# Altium PCB RS485.PcbDoc
Units mil, origin at the board's own origin, x right, y up, seen from the top; angles counter-clockwise.
Board outline 2567.03 x 892.03 mil, 2 copper layers (Top Layer, Bottom Layer); 37 components, 24 nets, 115 pads, 41 vias.
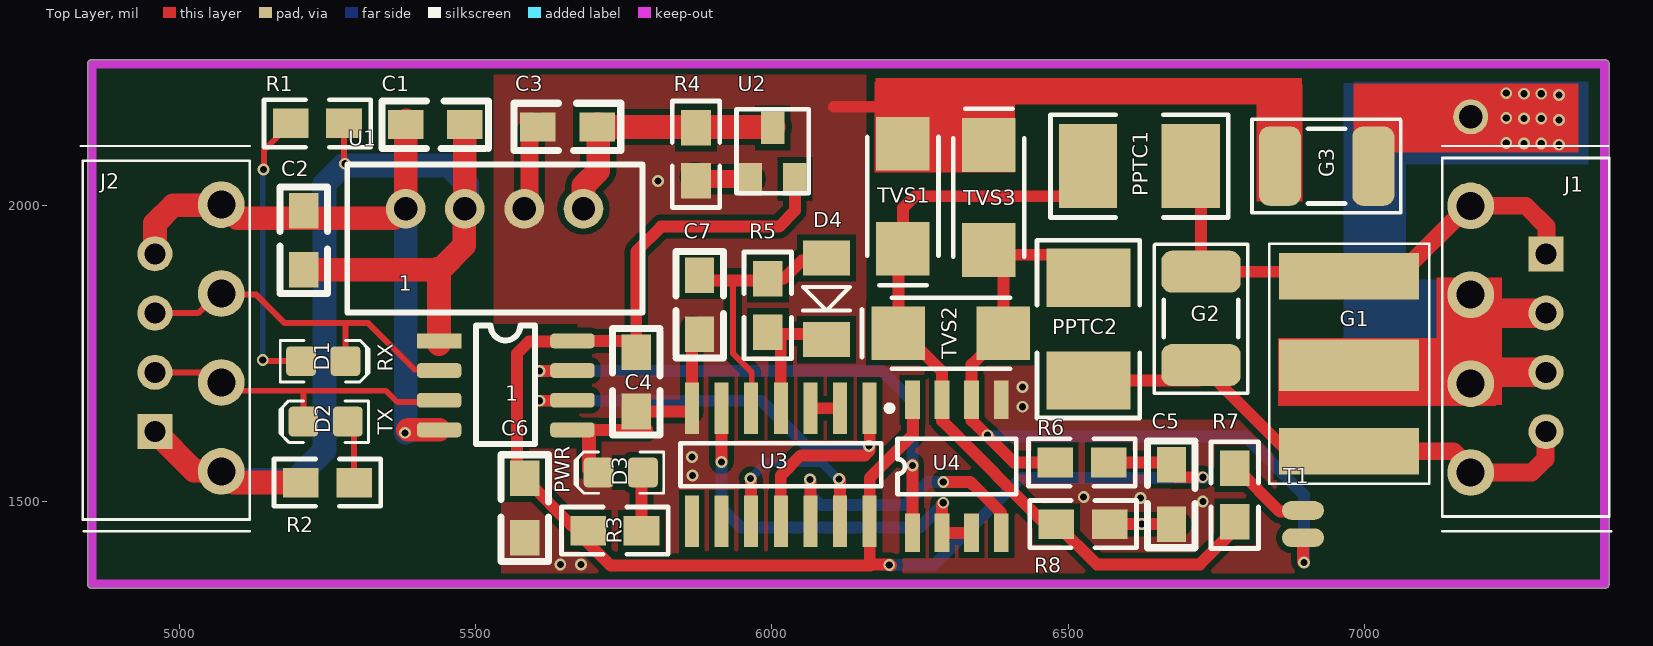
[diagram p0: Top Layer view]
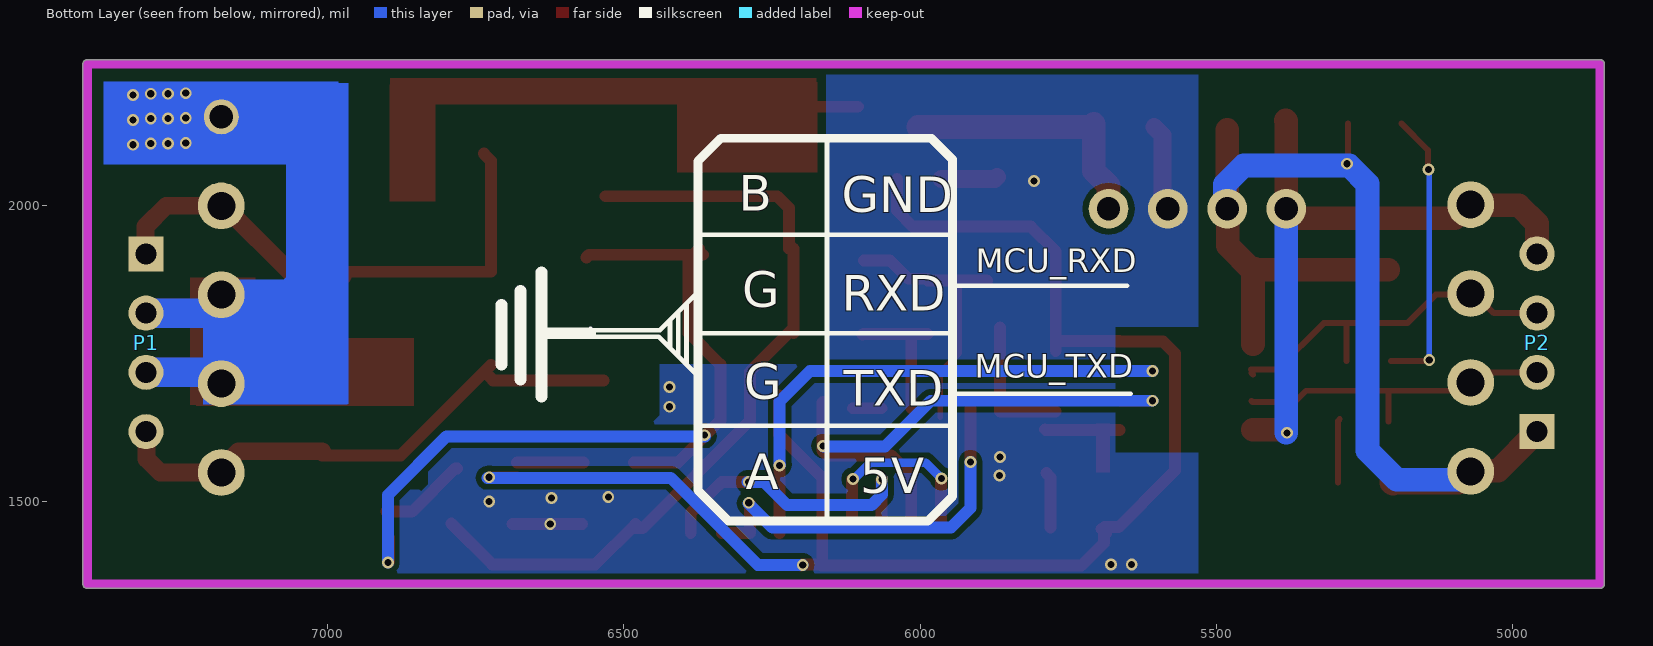
[diagram p1: Bottom Layer view, seen from below]

## Layer stack, top to bottom
Top Solder: solder mask 0.4, Solder Resist, Dk 3.5
Top Layer: signal copper 1.4
Dielectric1: dielectric 12.6, FR-4, Dk 4.8
Bottom Layer: signal copper 1.4
Bottom Solder: solder mask 0.4, Solder Resist, Dk 3.5

## Board outline
4845.48,1361 ccw(c4853,1361) 4853,1353.48 7405,1353.48 ccw(c7405,1361) 7412.52,1361 7412.52,2238 ccw(c7405,2238) 7405,2245.51 4853,2245.51 ccw(c4853,2238) 4845.48,2238

## Design rules (kind name [scope] priority, off if disabled: settings)
Clearance [All] p1: gap=10
PlaneConnect [All] p1: planeconnectstyle=Direct reliefexpansion=20 reliefentries=4 reliefconductorwidth=10 reliefairgap=10
PolygonConnect [All] p1: connectstyle=Direct reliefconductorwidth=10 reliefentries=4 polygonreliefangle="90 Angle" airgapwidth=10
RoutingVias [All] p1: holewidth=28 width=50 viastyle="Through Hole" minholewidth=28 minwidth=50 maxholewidth=28 maxwidth=50
SolderMaskExpansion [All] p1: expansion=4
Width [All] p1: maxlimit=100 minlimit=10 preferedwidth=10
29 further rules are at their usual default settings.

## Components (designator, comment, footprint, x,y, rotation, side; value= is the part's Value field where it differs from the comment)
1 "ADU3201" SO-8 5551,1696 r0 top
C1 "104" C_0805 5432,2136 r0 top
C2 "4.7uF" C_0805 5210,1941 r270 top
C3 "105" C_0805 5655,2132 r0 top
C4 "104" C_0805 5771,1702 r90 top
C5 "104" C_0805 6674,1512 r90 top
C6 "104" C_0805 5583,1489 r90 top
C7 "104" C_0805 5878,1832 r270 top
D1 "LED" 0805-LED-RED 5243,1737 r0 top
D2 "LED" 0805-LED-RED 5247,1635 r180 top
D3 "LED" 0805-LED-RED 5745,1549 r180 top
D4 "1N4148" DIODE-1206 6092,1911 r270 top
G1 "GDT_3" GDT3B 6979,1725 r0 top
G2 "GDT" 1812_C 6724,1809 r90 top
G3 "GDT" 1812_C 6936,2066 r0 top
J1 "CON4" Conect4_3.81E 7181,1775 r90 top
J2 "CON4" Conect4_3.81E 5069,1775 r270 top
P1 "Header 4" HDR1X4 7306,1918 r270 bottom
P2 "Header 4" HDR1X4 4959,1618 r90 bottom
PPTC1 "0.1A 60V" 1812F 6620,2066 r0 top
PPTC2 "0.1A 60V" 1812F 6534,1791 r270 top
R1 "5K" 0805 5188,2138 r0 top
R2 "5K" 0805 5295,1532 r180 top
R3 "3.3K" 0805 5780,1451 r180 top
R4 "470" 0805 5872,2041 r90 top
R5 "10K" 0805 5993,1786 r90 top
R6 "4.7K" 0805 6568,1566 r180 top
R7 "120" 0805 6781,1556 r270 top
R8 "4.7K" 0805 6480,1462 r0 top
T1 "TIN" TIN 6975,1471 r270 top
TVS1 "TVS_2" DIODE-SMA 6221,2015 r270 top
TVS2 "TVS_2" DIODE-SMA 6302,1784 r180 top
TVS3 "TVS_2" DIODE-SMA 6366,2013 r90 top
U1 "B0505S-1W" B0505S-1W 5582,1869 r270 top
U2 "ME6209_SOT233" "SOT-23 - duplicate1" 5964,2044 r0 top
U3 "74LS04" SOP-14N 6015,1562 r270 top
U4 "SP3485" SOP-8 6237,1447 r90 top

## Footprints (in the part's own frame and the unit in brackets; to place one, negate y for a bottom-side part, rotate by r counter-clockwise, add the part's x,y. Pads: shape width x height; smd on the part's side, far side on the other; paste and mask are expansions set on the pad)
0805 [mil]
  rect 60x50 smd: 1(0,0) 2(90,0)
  silkscreen extent -45,-40 135,40
0805-LED-RED [mil]
  round 20 on Mech14: 0(0,0)
  rrect25% 50x50 smd: A(-37.5,0) K(37.5,0)
  Top Layer pour cut-out: -15,30 15,30 15,-30 -15,-30
  silkscreen extent -73,-35 77,35, body extent -39,-25 39,25, height 31
1812_C [mm]
  rrect50% 1.8x3.4 smd: 1(-2,0) 2(2,0)
  silkscreen extent -3.2,-2.01 3.17,2, body extent -2.4,-1.6 2.4,1.6, height 1.6
1812F [mm] "保险丝"
  rect 2.5x3.6 smd: 1(-2.2,0) 2(2.2,0)
  silkscreen extent -3.81,-2.2 3.81,2.2, body extent -2.54,-1.65 2.67,1.65, height 1.2
B0505S-1W [mm]
  round 1.7 hole 1: 1(-3.175,-5.08) 2(-3.175,-2.54) 3(-3.175,0) 4(-3.175,2.54)
  silkscreen extent -5.08,-7.58 1.27,5.08
C_0805 [mil]
  rect 60x49.21 smd: 1(-50,0) 2(50,0)
  silkscreen extent -90,-40 90,40, body extent -45,-25 34,25, height 36
Conect4_3.81E [mm]
  round 2 hole 1.2: 1(5.69,0.051) 2(1.88,0.051) 3(-1.93,0.051) 4(-5.74,0.051)
  silkscreen extent -8.25,-5.97 8.25,1.27
DIODE-1206 [mm] "玻璃封装二极管"
  rect 1.5x2 smd: 1(0,0) 2(3.5,0)
  silkscreen extent 1.25,-1 2.25,1
DIODE-SMA [mm] "贴片二极管"
  rect 2.3x2.3 smd: 1(-2.25,0) 2(2.25,0)
  silkscreen extent -2.54,-1.52 3.81,1.52, body extent -2.92,-1.4 2.92,1.4, height 3
GDT3B [mil]
  rect 236.22x78.74 smd: 1(-5,155) 3(-5,-140)
  rect 236.22x86.61 smd: 2(-5,5)
  silkscreen extent -140,-195 130,210
HDR1X4 [mm] "Connector; Header; 4 Position"
  rect 1.5x1.5 hole 0.9: 1(0,0)
  round 1.5 hole 0.9: 2(2.54,0) 3(5.08,0) 4(7.62,0)
SO-8 [mil]
  round 20 on Top Overlay: 0(-28.5,62.8)
  rect 75x25 smd: 1(-112.5,75)
  rrect50% 75x25 smd: 2(-112.5,25) 3(-112.5,-25) 4(-112.5,-75) 5(112.5,-75) 6(112.5,-25) 7(112.5,25) 8(112.5,75)
  silkscreen extent -50,-99 50,101, body extent -118,-96 118,96
SOP-8 [mil]
  rect 65x25 smd: 1(0,0) 2(0,-50) 3(0,-100) 4(0,-150) 5(224.41,-150) 6(224.41,-100) 7(224.41,-50) 8(224.41,0)
  silkscreen extent 65,-175 159,25
SOP-14N [mm] "SOP, 14-Leads,"
  rect 2.2x0.6 smd: 1(-2.425,3.81) 2(-2.425,2.54) 3(-2.425,1.27) 4(-2.425,0) 5(-2.425,-1.27) 6(-2.425,-2.54) 7(-2.425,-3.81) 8(2.425,-3.81) 9(2.425,-2.54) 10(2.425,-1.27) 11(2.425,0) 12(2.425,1.27) 13(2.425,2.54) 14(2.425,3.81)
  silkscreen extent -2.55,-4.3 0.93,4.79, body extent -3.03,-4.35 3.03,4.35, height 1.95
"SOT-23 - duplicate1" [mm]
  rect 1x1.4 smd: 1(0,0) 2(1.9,0) 3(0.95,2.2)
  silkscreen extent -0.6,-0.6 2.5,3, body extent -0.51,-0.18 2.39,2.62
TIN [mil]
  oval 31.5x70.87 smd: 1(-14,-79) 2(32,-79)

## Part data
C1 C2 C3 C4 C5 C6 C7: library part C
D4: library part D
G1 G2 G3: "放电器"
P1 P2: "Header, 4-Pin"
PPTC1 PPTC2: library part PPTC
R1 R2 R3 R4 R5 R6 R7 R8: library part R
TVS1 TVS2 TVS3: "TVS双向二极管"
U1: "DC/DC隔离电源（Mornsun）"
U2: library part ME6209
U3: "非门"
U4: library part MAX3485

## Free pads (board coordinates)
  round 59.06 hole 39.37: 2(7179,2149)

## Via types
v1: diameter 20, hole 12, Top Layer to Bottom Layer, 41 vias

## Nets (pads, with @x,y where several pads share a name; then routed paths per layer and width w, separated by ;. In a path a pad name is that pad's centre, name@x,y a point inside that pad or via, vN(x,y) a via of type N, cw(c..) or ccw(c..) an arc to the next point about the centre after c; other vN are vias at no path point)
485_A: PPTC2.1 R6.2 T1.2 TVS2.1 TVS3.1 U4.6 | length 1422.5
  Top Layer w20: TVS3.1@6366,1916.42 TVS3.1@6382.58,1916.42 ; TVS3.1@6373,1926 TVS3.1@6382.58,1916.42 ; TVS2.1@6389,1783 6337,1731 U4.6 6337,1637 6408,1566 R6.2 R6.2@6483,1566 ; TVS2.1 6390.58,1908.42 TVS3.1@6382.58,1916.42 ; PPTC2.1@6563,1912 6558.58,1916.42 TVS3.1@6382.58,1916.42 ; T1.2 6896,1399 v1@6897,1398
  Bottom Layer w20: v1@6363,1610 6799,1610 6898,1511 v1(6898,1397)
  other v1: 6364,1612
485_B: PPTC1.1 R7.2 R8.1 TVS1.2 TVS2.2 U4.7 | length 1355.1
  Top Layer w20: TVS2.2 6213.42,1926.42 TVS1.2@6217,1930 ; TVS2.2@6217,1789 6287,1719 U4.7 6287,1636 6468,1455 R8.1@6483,1455 ; TVS1.2 6221,1995 6241,2015 PPTC1.1@6531,2015 ; R8.1 6548,1394 6722,1394 R7.2@6791,1463
485_EN: U3.6 U4.2 U4.3 | length 669.1
  Top Layer w20: v1@5915,1568 U3.6 ; v1@6287,1496 U4.2 U4.3@6334,1447
  Bottom Layer w20: v1(5915,1567) 5915,1489 5948,1456 6249,1456 v1@6290,1497
  other v1: 6289,1498
485_RX: 1.7 U4.1 | length 923.5
  Top Layer w20: v1(5608,1720) 1.7@5658,1720 ; U4.1 v1(6237,1561) v1@6237,1563
  Bottom Layer w20: v1(5608,1720) 6186,1720 6237,1669 6237,1563 v1@6236,1562
485_TX: U3.12 U4.4 | length 498
  Top Layer w20: v1(6064,1537) 6065,1536 U3.12 ; v1@6291,1533 6334.57,1533 6338.57,1529 6339,1529 6387,1481 U4.4
  Bottom Layer w20: v1(6064,1537) 6064,1512 6082,1494 6224,1494 6263,1533 v1@6291,1533
  other v1: 6289,1533
A: G1.3 G2.1 J1.4 P1.4 PPTC2.2 | length 931.3
  Top Layer w20: PPTC2.2 6720.39,1704.39 G2.1@6735.13,1719.13 ; G2.1 G2.1@6735.13,1719.13 ; G1.3@7009,1578 6876.26,1578 G2.1@6735.13,1719.13
  Top Layer w30: G1.3@7009,1585 7150,1585 J1.4@7185,1550 ; J1.4 7282,1549 7305,1572 P1.4@7305,1622
ADU_RX: 1.2 D1.K J2.3 P2.3 | length 615
  Top Layer w10: P2.3 5032,1818 J2.3@5066,1852 ; J2.3@5068,1849 5130,1849 5178,1801 5319,1801 5397,1723 1.2@5442,1723 ; D1.K 5280.5,1800.5 ; 1.2@5438,1714 1.2@5441,1717
ADU_TX: 1.3 D2.K J2.2 P2.2 | length 559.8
  Top Layer w10: P2.2 5048,1718 J2.2@5069,1697 ; J2.2@5066,1706 J2.2 5085,1687 5349,1687 5368,1668 5439,1668 1.3@5441,1670 ; D2.K 5209.5,1684.5
ADU_TXO: 1.6 U3.1 U3.11 | length 968.2
  Top Layer w20: v1(5608,1670) 1.6@5662,1670 ; U3.11 6015,1544 6049,1578 6157,1578 6165,1586 6165,1667 U3.1@6164,1668
  Bottom Layer w20: v1(5608,1670) 5982,1670 6059,1593 v1@6163,1593
  other v1: 6164,1594
B: G1.1 G2.2 J1.1 P1.1 PPTC1.2 | length 913.6
  Top Layer w20: PPTC1.2@6736,2087 6724,2075 G2.2 6983.26,1887.74 G1.1@6988,1883
  Top Layer w30: G1.1 7056,1880 J1.1@7179,2003 ; J1.1 7272,1999 7307,1964 P1.1@7307,1919
GGND: G1.2 G3.2 J1.2 J1.3 P1.2 P1.3 pad.2 | length 1754.2
  Top Layer w50: G1.2@6888,1699 J1.3 J1.3@7179,1718 ; J1.3@7167,1718 J1.3@7179,1718 ; J1.2@7174,1818 J1.2@7179,1818 ; J1.2 J1.2@7179,1857 ; P1.3 J1.3@7179,1718 ; P1.2 J1.2@7179,1818 ; J1.3@7179,1718 J1.2@7179,1818
  Bottom Layer w50: J1.3@7154,1715 7157,1718 J1.3@7181,1718 ; J1.2@7162,1824 7168,1818 J1.2@7181,1818 ; pad.2 7000,2151 7000,1913 7064,1849 J1.2 7181,1849 J1.2@7181,1824 ; J1.3@7181,1702 J1.3@7181,1718 ; P1.3 J1.3@7181,1718 ; P1.2 J1.2@7181,1818 ; J1.3@7181,1718 J1.2@7181,1818
  other v1: 7328,2102 7269,2104 7298,2104 7239,2105 7328,2144 7269,2146 7298,2146 7239,2147 7328,2186 7269,2188 7298,2188 7239,2189
GND: 1.4 C1.1 C2.1 J2.4 P2.4 U1.1 | length 1083.2
  Top Layer w40: P2.4 4959,1969 4990,2000 J2.4@5072,2000 ; J2.4@5073,2003 5098,1978 5362,1978 U1.1@5382,1998 ; U1.1@5383,1999 U1.1@5382,1998 ; C1.1@5383,2143 5382,2142 U1.1@5382,1998 ; v1@5386,1621 1.4 ; U1.1@5387,1987 U1.1@5388,1988
  Bottom Layer w40: v1@5382,1616 U1.1
  other v1: 5381,1616
GND_485: 1.5 C3.1 C4.1 C5.1 C6.1 C7.2 D3.K G3.1 R4.1 R8.2 TVS1.1 TVS3.2 U1.3 U2.1 U3.7 U4.5 | length 883.5
  Top Layer w20: C3.1@5603,2132 C3.1@5603,2134 ; 1.5 5788,1621 5789,1622 ; C4.1 U3.7@5865,1652 ; U3.7 C7.2@5865,1794 ; 6105,2166 6268,2166 6270,2164 ; TVS3.2@6373.58,2103.58 TVS3.2@6374,2104 ; R8.2 C5.1@6688,1462
  Top Layer w30: U1.3@5581,1997 5591,2007 5591,2118 C3.1 ; R4.1@5870,2048 5874,2044 U2.1
  other v1: 5643,1394 5678,1394 6624,1462 6727,1500 6622,1506 6526,1508 5866,1544 5865,1575 6423,1660 6423,1693 5808,2041
NetC3_2: C3.2 R4.2 U1.4 U2.3 | length 449.4
  Top Layer w40: U1.4 5682,2033 5707,2058 C3.2@5707,2132 ; C3.2@5707,2137 C3.2@5707,2132 ; U2.3@6003,2132 C3.2@5707,2132
NetC7_1: C7.1 D4.1 R5.2 U3.5 | length 464.1
  Top Layer w10: 5934,1873 5934,1750 5966,1718 U3.5@5966,1643
  Top Layer w20: C7.1@5887,1873 5934,1873 R5.2@5987,1873 ; R5.2@5987,1876 6020,1876 6051,1907 D4.1@6095,1907
NetD1_A: D1.A R1.1 | length 477.6
  Top Layer w10: v1@5143,1736 5144,1737 D1.A ; v1@5143,2060 5143,2093 R1.1
  Bottom Layer w10: v1(5141,1739) v1@5141,2057
  other v1: 5142,2060
NetD2_A: D2.A R2.1 | length 108.2
  Top Layer w10: D2.A@5292,1639 5295,1636 R2.1
NetD3_A: D3.A R3.1 | length 94.9
  Top Layer w20: R3.1@5780,1456 5780,1541 D3.A@5787,1548
NetD4_2: D4.2 R5.1 U3.4 | length 232.9
  Top Layer w20: R5.1@5987,1783 6096,1783 D4.2@6097,1782 ; U3.4 R5.1@6015,1780
NetR7_1: R7.1 T1.1 | length 157.2
  Top Layer w10: T1.1 T1.1@6904,1485
  Top Layer w20: R7.1 6784,1556 6857,1483 T1.1@6900,1483
NetU3_2: U3.2 U3.3 | length 48.5
  Top Layer w20: U3.3 U3.2@6113.53,1657.47
NetU3_10: U3.10 U3.13 | length 312.7
  Top Layer w20: U3.10 v1@5965,1537 ; U3.13 v1@6115,1537
  Bottom Layer w15: v1(5964,1539) 5990.5,1565.5 6084.5,1565.5 v1@6113,1537
  other v1: 6113,1538
VCC5V: 1.1 C1.2 C2.2 J2.1 P2.1 R1.2 R2.2 U1.2 | length 1938.3
  Top Layer w10: v1@5278,2070 R1.2
  Top Layer w40: P2.1 5025,1552 J2.1@5070,1552 ; J2.1@5072,1551 5091,1532 R2.2@5200,1532 ; R2.2@5195,1537 R2.2@5200,1532 ; R2.2@5202,1530 R2.2@5200,1532 ; R2.2 R2.2@5200,1532 ; C2.2 5437,1891 ; 5435,1893 5437,1891 ; 1.1@5438.5,1766 1.1 5438.5,1889.5 5437,1891 ; U1.2@5481,1994 5481,1932 5440,1891 5437,1891 ; U1.2 C1.2@5482,2127
  Bottom Layer w10: U1.2@5483,1995 U1.2@5483,1996
  Bottom Layer w40: J2.1@5062,1551 5076,1537 5196,1537 5245,1586 5245,2036 5276,2067 5454,2067 5486,2035 U1.2@5486,1996 ; U1.2@5483.5,1993.5 U1.2@5486,1991
  other v1: 5280,2070
VCC5V_485: 1.8 C4.2 C5.2 C6.2 R3.2 R6.1 U2.2 U3.14 U4.8 | length 2715.6
  Top Layer w20: 1.8 C4.2@5768,1771 ; 1.8@5671,1770 5590,1770 5570,1750 5570,1552 C6.2 5665,1457 R3.2@5689,1457 ; R3.2@5686,1446 R3.2@5690,1450 ; R3.2 R3.2@5690,1450 ; R3.2@5694,1454 R3.2@5690,1450 ; C4.2@5771,1754 5771,1922 5813,1964 6012,1964 6038.8,1990.8 U2.2 ; 6166,1392 5728,1392 5690,1430 R3.2@5690,1450 ; v1@6201,1392 6199,1394 6165,1394 U3.14 6165,1540 6238,1613 U4.8@6238,1679 ; R6.1 C5.2@6680,1566 ; C5.2@6680,1541 v1(6727,1541)
  Bottom Layer w20: v1(6198,1393) 6274,1393 6421,1540 v1@6730,1540
pads on no net: 1.0 D1.0 D2.0 D3.0 U3.8 U3.9

## Polygon pours and split planes (outlines as drawn)
GND_485 on Top Layer "AutoNaming" (solid, pour order 0): 5531,2244 5531,1355 5534,1352 6945,1352 6945,2242
GND_485 on Bottom Layer "AutoNaming" (solid, pour order 2): 5523,2246 5522,2245 5522,1357 6944,1357 6947,1354 6925,1376 6925,2240

## Keep-outs
Keep-Out Layer:
  lines w15: 4853,1361 4853,2238 7405,2238 7405,1361 4853,1361

## Other copper
Top Layer:
  rectangle net GGND: 7121,1663 7232,1878
  rectangle net GGND: 6854,1661 7222,1776
  rectangle net GND_485: 5680,1549 5703,1632
  rectangle net GGND: 6981,2089 7361,2205
  rectangle net GND_485: 6173,2055 6410,2208
  rectangle net GND_485: 6175,2170 6894,2215
  rectangle net GND_485: 6818,2006 6895,2204
  pour cut-out: 6157,2230 6159,2228 6159,1740 6444,1740 6446,1738 6443,1735 6443,1638 6837,1638 6852,1623 6852,1522 6942,1522 6946,1518 6942,1514 6942,1353 6944,1355 7411,1355 7411,2241 7406,2246 6157,2246
  pour cut-out: 5394,2243 5394,1355 5393,1354 5543,1354 5543,1588 5545,1590 5546,1589 5672,1589 5672,1800 5531,1800 5531,1995 5531,2238 5531,2243
Bottom Layer:
  rectangle net GGND: 6966,1664 7210,1875
  rectangle net GGND: 6964,1665 7070,2206
  rectangle net GGND: 6981,2069 7378,2209
  pour cut-out: 6158,2246 6158,1740 6155,1737 6160,1732 6439,1732 6439,1646 6452,1633 6830,1633 6830,1529 6842,1517 6845,1520 6943,1520 6943,1364 6954,1353 7414,1353 7414,2238 7405,2247 6155,2247
  pour cut-out: 5435,2246 5434,2245 5434,1356 5533,1356 5531,1358 5531,1582 5672,1582 5671,1583 5671,1795 5553,1795 5550,1795 5547,1795 5531,1795 5531,2242 5532,2243

## Silkscreen, mask and mechanical layers (free items; w line width, h text height)
Top Overlay:
  text "RX" at 5360,1719 h25 r90
  text "TX" at 5360,1613 h25 r90
  text "PWR" at 5659,1514 h25 r90
Bottom Overlay:
  lines w8: 5645,1682 5939,1682 ; 5651,1864 5937,1864 ; 5943,1628 6373,1628 ; 5944,1784 6375,1784 ; 5948,1950 6371,1950 ; 6157,1467 6157,2113 ; 6374,1689 6376,1687 6376,1713 6441,1778 6553,1778 6557,1782 6558,1782 ; 6376,1871 6376,1888 6376,1852 6439,1789 6554,1789 6556,1791 ; 6394,1734 6394,1831 ; 6408,1745 6408,1817 ; 6422,1760 6422,1805
  lines w15: 5945,1509 5945,2077 5981,2113 6336,2113 6375,2074 6375,1519 6323,1467 5987,1467 5945,1509
  lines w20: 6557,1784 6629,1784 ; 6639,1677 6639,1887 ; 6674,1706 6674,1855 ; 6706,1731 6706,1832
  text "B" at 6306,1991 h60
  text "GND" at 6132,1988 h60
  text "MCU_RXD" at 5906,1887 h40
  text "G" at 6300,1828 h60
  text "RXD" at 6132,1822 h60
  text "MCU_TXD" at 5908,1709 h40
  text "G" at 6297,1673 h60
  text "TXD" at 6129,1662 h60
  text "A" at 6294,1521 h60
  text "5V" at 6101,1514 h60

## Text inside footprints (layer, text, board x,y; h text height)
U1: Top Overlay "1" at 5370.19,1855.76 h25